# Altium PCB DC_AC_Inverter.PcbDoc (part 3 of 4)
Units mil, origin at the board's own origin, x right, y up, seen from the top; angles counter-clockwise.
Board outline 6496.06 x 4566.93 mil, 6 copper layers (L1, L2, L3, L4, L5, L6), stack 22.312 mil thick; 133 components, 65 nets, 349 pads, 134 vias.
Unrouted connection lines stored in the file: 226.
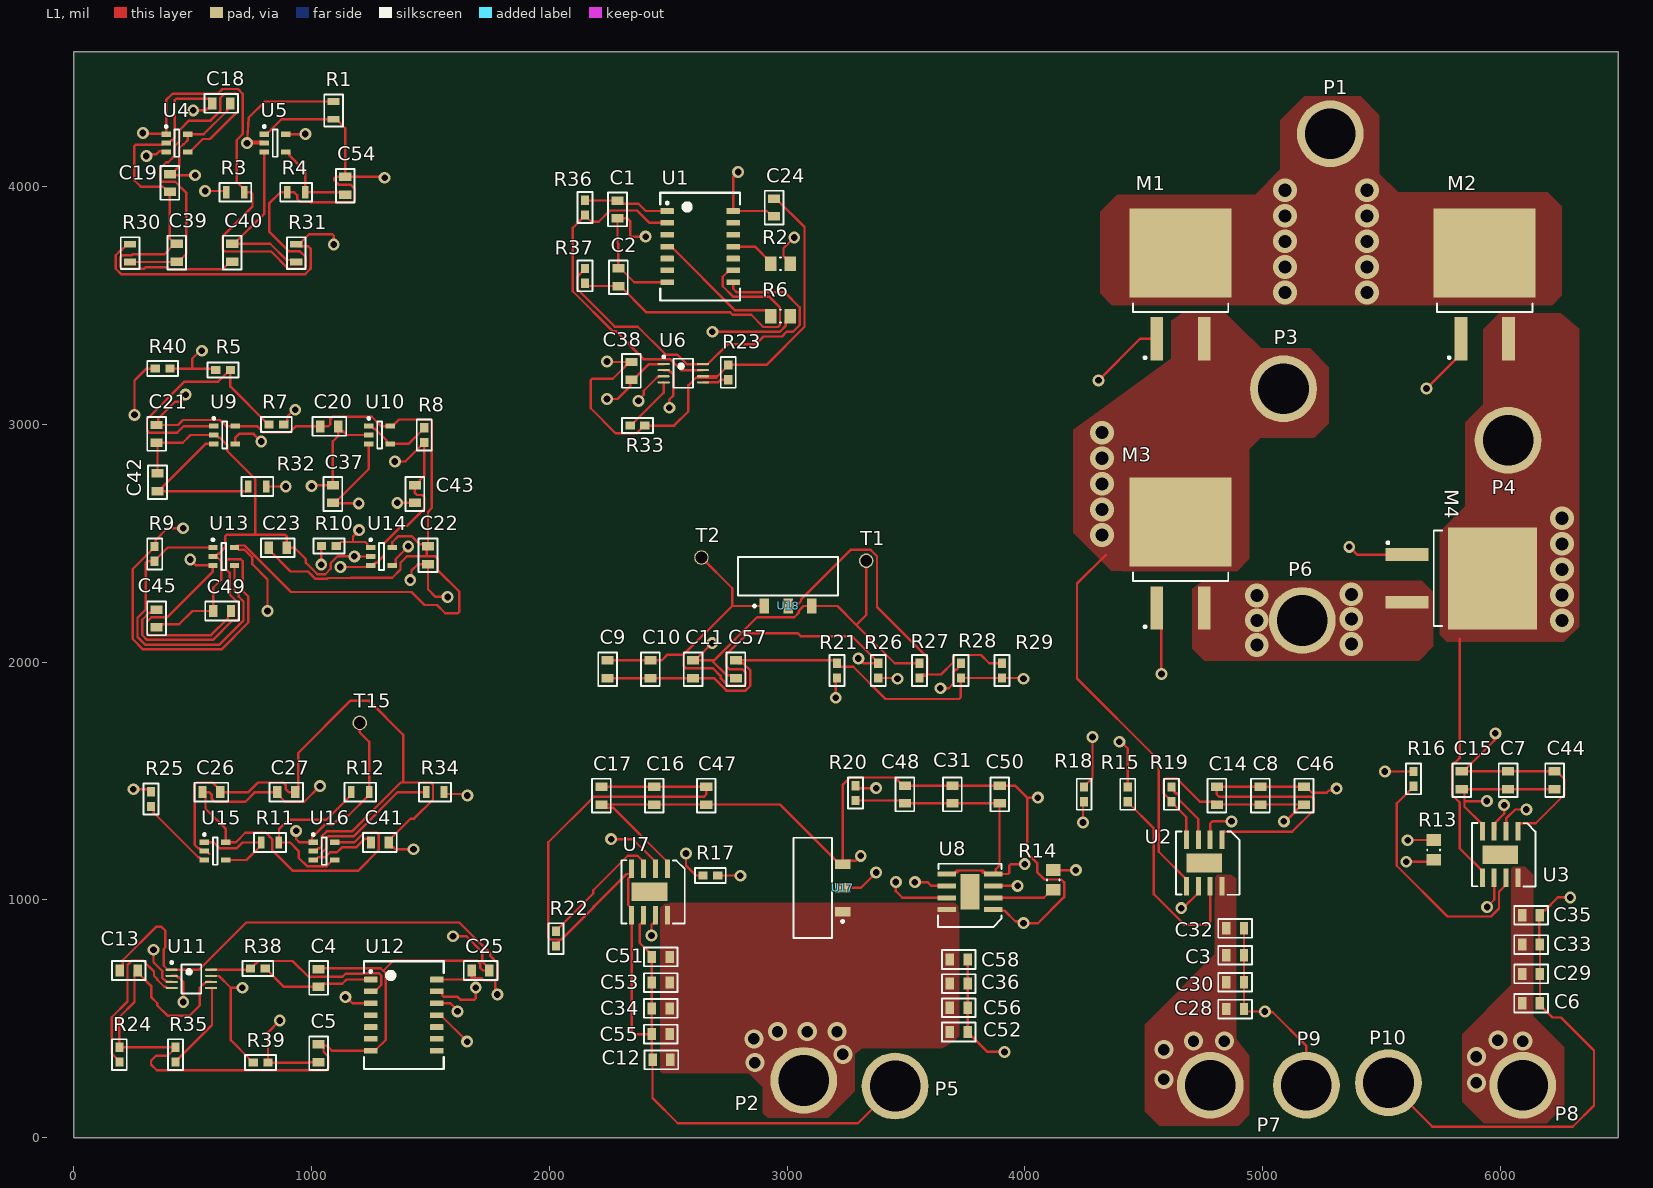
[diagram p0: L1 view]

## Part data (continued)
R28: library part ERA-2ARB751X, "Res Thin Film 0402 750 Ohm 0.1% 0.063W(1/16W) ±10ppm/C Pad SMD Automotive T/R", Case Code (Imperial)=0402, Case Code (Metric)=1005, Manufacturer=Panasonic, Manufacturer Lifecycle Status=ACTIVE, Max Operating Temperature=155°C, Max Power Dissipation=63mW, Min Operating Temperature=-55°C, Supplier Part Number=10-ERA-2ARB751XDKR-ND, Temperature Coefficient=10ppm/°C, Tolerance=0.1%, Voltage Rating=50V, Case/Package=0402, Category="Chip SMD Resistors", ComponentLink1Description=https://datasheet.octopart.com:443/ERA-2ARB751X-Panasonic-datasheet-62287448.pdf?src-supplier=Panasonic, ComponentLink1URL=https://datasheet.octopart.com:443/ERA-2ARB751X-Panasonic-datasheet-62287448.pdf?src-supplier=Panasonic, ComponentLink2Description=https://datasheet.octopart.com:443/ERA-2ARB751X-Panasonic-datasheet-46744048.pdf?src-supplier=Newark, ComponentLink2URL=https://datasheet.octopart.com:443/ERA-2ARB751X-Panasonic-datasheet-46744048.pdf?src-supplier=Newark, ComponentLink3Description=https://datasheet.octopart.com:443/ERA2ARB751X-Panasonic-datasheet-136531316.pdf?src-supplier=element14+APAC, ComponentLink3URL=https://datasheet.octopart.com:443/ERA2ARB751X-Panasonic-datasheet-136531316.pdf?src-supplier=element14+APAC, ComponentLink4Description=https://sigma.octopart.com:443/150570796/technical_drawing/Panasonic-ERA2ARB751X.pdf?src-supplier=Panasonic+SCT, ComponentLink4URL=https://sigma.octopart.com:443/150570796/technical_drawing/Panasonic-ERA2ARB751X.pdf?src-supplier=Panasonic+SCT, ComponentLink5Description=https://datasheet.octopart.com/ERA-2ARB751X-Panasonic-datasheet-78375410.pdf, ComponentLink5URL=https://datasheet.octopart.com/ERA-2ARB751X-Panasonic-datasheet-78375410.pdf, Composition="Thin Film", Features="Automotive AEC-Q200", Height=350µm, Lead Free="Lead Free", Length=990.6µm, Lifecycle Status=Production, Manufacturer Part Number=ERA-2ARB751X, Mounting Technology="Surface Mount", Number of Terminals=2, Number of Terminations=2, Packaging="Cut Tape", Part Series="Thin Film Chip Resistors, High Reliability Type", Power Dissipation=63mW, Power Rating=63mW, Pricing="1=0.46, 10=0.386, 25=0.358, 50=0.3382, 100=0.3198, 250=0.29784, 500=0.28296, 1000=0.26954, 5000=0.25765 (USD)", REACH SVHC=Yes, RoHS=Compliant, Stock=11665, Supplier=DigiKey, Voltage Rating (DC)=50V, Width=500µm, Working Voltage=50V
R40: library part RC0402FR-07470KL, "62.5mW Thick Film Resistors 50V ±100ppm/℃ ±1% 470kΩ 0402 Chip Resistor - Surface Mount ROHS", Case Code (Imperial)=0402, Manufacturer="Yageo Group", Max Operating Temperature=155°C, Max Power Dissipation=63mW, Min Operating Temperature=-55°C, Power Dissipation=62.5mW, Supplier Part Number=311-470KLRCT-ND, Temperature Coefficient=100ppm/°C, Tolerance=1%, Voltage Rating=50V, Case/Package=0402, Category="Chip SMD Resistors", China RoHS=Non-Compliant, ComponentLink1Description=https://datasheet.octopart.com:443/RC0402FR-07470KL-Yageo-datasheet-175887523.pdf?src-supplier=IHS, ComponentLink1URL=https://datasheet.octopart.com:443/RC0402FR-07470KL-Yageo-datasheet-175887523.pdf?src-supplier=IHS, ComponentLink2Description=https://datasheet.octopart.com:443/RC0402FR-07470KL-Yageo-datasheet-103092701.pdf?src-supplier=Upverter, ComponentLink2URL=https://datasheet.octopart.com:443/RC0402FR-07470KL-Yageo-datasheet-103092701.pdf?src-supplier=Upverter, ComponentLink3Description=https://datasheet.octopart.com:443/RC0402FR-07470KL-Yageo-datasheet-141435361.pdf?src-supplier=Upverter, ComponentLink3URL=https://datasheet.octopart.com:443/RC0402FR-07470KL-Yageo-datasheet-141435361.pdf?src-supplier=Upverter, ComponentLink4Description=https://datasheet.octopart.com:443/RC0402FR-07470KL-Yageo-Group-datasheet-190305687.pdf?src-supplier=Newark, ComponentLink4URL=https://datasheet.octopart.com:443/RC0402FR-07470KL-Yageo-Group-datasheet-190305687.pdf?src-supplier=Newark, ComponentLink5Description=https://datasheet.octopart.com:443/RC0402FR-07470KL-Yageo-datasheet-8324527.pdf?src-supplier=Newark, ComponentLink5URL=https://datasheet.octopart.com:443/RC0402FR-07470KL-Yageo-datasheet-8324527.pdf?src-supplier=Newark, ComponentLink6Description=https://datasheet.octopart.com:443/RC0402FR-07470KL-Yageo-datasheet-10408619.pdf?src-supplier=element14+APAC, ComponentLink6URL=https://datasheet.octopart.com:443/RC0402FR-07470KL-Yageo-datasheet-10408619.pdf?src-supplier=element14+APAC, ComponentLink7Description=https://datasheet.octopart.com:443/RC0402FR-07470KL-Yageo-datasheet-62067350.pdf?src-supplier=element14+APAC, ComponentLink7URL=https://datasheet.octopart.com:443/RC0402FR-07470KL-Yageo-datasheet-62067350.pdf?src-supplier=element14+APAC, ComponentLink8Description=https://datasheet.octopart.com:443/RC0402FR-07470KL-Yageo-Group-datasheet-176638170.pdf?src-supplier=Future+Electronics, ComponentLink8URL=https://datasheet.octopart.com:443/RC0402FR-07470KL-Yageo-Group-datasheet-176638170.pdf?src-supplier=Future+Electronics, ComponentLink9Description=https://datasheet.octopart.com:443/RC0402FR-07470KL-Yageo-datasheet-164759695.pdf?src-supplier=Future+Electronics, ComponentLink9URL=https://datasheet.octopart.com:443/RC0402FR-07470KL-Yageo-datasheet-164759695.pdf?src-supplier=Future+Electronics, ComponentLink10Description=https://datasheet.octopart.com:443/RC0402FR-07470KL-Yageo-datasheet-137700087.pdf?src-supplier=Future+Electronics, ComponentLink10URL=https://datasheet.octopart.com:443/RC0402FR-07470KL-Yageo-datasheet-137700087.pdf?src-supplier=Future+Electronics, ComponentLink11Description=https://datasheet.octopart.com:443/RC0402FR-07470KL-Yageo-datasheet-12531192.pdf?src-supplier=Future+Electronics, ComponentLink11URL=https://datasheet.octopart.com:443/RC0402FR-07470KL-Yageo-datasheet-12531192.pdf?src-supplier=Future+Electronics, ComponentLink12Description=https://datasheet.octopart.com:443/RC0402FR-07470KL-Yageo-datasheet-505231.pdf?src-supplier=Future+Electronics, ComponentLink12URL=https://datasheet.octopart.com:443/RC0402FR-07470KL-Yageo-datasheet-505231.pdf?src-supplier=Future+Electronics, ComponentLink13Description=https://datasheet.octopart.com:443/RC0402FR-07470KL-Yageo-datasheet-148775077.pdf?src-supplier=TME, ComponentLink13URL=https://datasheet.octopart.com:443/RC0402FR-07470KL-Yageo-datasheet-148775077.pdf?src-supplier=TME, ComponentLink14Description=https://datasheet.octopart.com/RC0402FR-07470KL-Yageo-datasheet-73766026.pdf, ComponentLink14URL=https://datasheet.octopart.com/RC0402FR-07470KL-Yageo-datasheet-73766026.pdf, ComponentLink15Description=https://datasheet.octopart.com:443/RC0402FR-07470KL-Yageo-datasheet-8329306.pdf?src-supplier=element14, ComponentLink15URL=https://datasheet.octopart.com:443/RC0402FR-07470KL-Yageo-datasheet-8329306.pdf?src-supplier=element14, ComponentLink16Description=http://sigma.octopart.com:80/conflict_mineral_statement/Yageo-company-3.pdf?src-supplier=Compliance+Statements, ComponentLink16URL=http://sigma.octopart.com:80/conflict_mineral_statement/Yageo-company-3.pdf?src-supplier=Compliance+Statements, ComponentLink17Description=http://sigma.octopart.com:80/rohs_statement/Yageo-company-2.pdf?src-supplier=Compliance+Statements, ComponentLink17URL=http://sigma.octopart.com:80/rohs_statement/Yageo-company-2.pdf?src-supplier=Compliance+Statements, Composition="Thick Film", Depth=500µm, Features="Moisture Resistant", Height=350µm, Lead Free="Lead Free", Length=1mm, Lifecycle Status=Production, Manufacturer Part Number=RC0402FR-07470KL, Military Standard=Not, Mounting Technology="Surface Mount", Number of Terminals=2, Number of Terminations=2, Packaging="Tape & Reel", Pins=2, Power Rating=63mW, Pricing="1=0.1, 10=0.007, 25=0.0056, 50=0.004, 100=0.0033 (USD)", REACH SVHC=Yes, RoHS=Compliant, Schedule B="8533210045, 8533210045|8533210045, 8533210045|8533210045|8533210045, 8533210045|8533210045|8533210045|8533210045", Stock=557194, Supplier=DigiKey, Termination=SMD/SMT, Voltage Rating (AC)=50V, Voltage Rating (DC)=50V, Width=500µm, Working Voltage=50V
T1 T2 T15: "Holes to test various points in the shcematic"
U1 U12: library part CD4081BNSR, "AND CD4081 EAR99 4000B logic gate circuit 90ns @ 15V 50pF 2mm 3.4mA 3.4mA 3.5V-11V", Case/Package=SOP, High Level Output Current=-4.2mA, Low Level Output Current=4.2mA, Manufacturer="Texas Instruments", Manufacturer Lifecycle Status=ACTIVE, Max Operating Temperature=125°C, Max Supply Voltage=18V, Min Operating Temperature=-55°C, Min Supply Voltage=3V, Output Current=6.8mA, Quiescent Current=5µA, Supplier Part Number=296-14140-1-ND, Category="Logic Gates", ComponentLink1Description=https://datasheet.octopart.com:443/CD4081BNSR-Texas-Instruments-datasheet-10794629.pdf?src-supplier=Texas+Instruments, ComponentLink1URL=https://datasheet.octopart.com:443/CD4081BNSR-Texas-Instruments-datasheet-10794629.pdf?src-supplier=Texas+Instruments, ComponentLink2Description=https://octopart.com:443/opatz8j6/c1?t=YxbNdJKEROS6Vm5KtYNJ_JyZt7EceMX1SIRKQtAb4Y8lWUVkYy39ZyZsE2-WATvXZN4TSf20npuENvJODiCamDGCNWilka1l9iY4MkQYjKrpUEBaOEb4I2_cjKmMvO0DzDUmCdmSlAdJj-YSBZskjReuIVWeu6zcmJhI4EWYC-jOIWhKVjLUC_2s64ZlV_TJwr1GUdjj7NQs9rSYcxVAXH8GRRzJ5L1klAQGmdoT7dVvhwtaa6KXKHm16KdF4QYR2F57j4FMw7rbM3S3FyRlCmusYW7cmmmcGzT9BesW2olY17NxMao1sKhRxMKa-IHifCTXBKwmACtW2WB27Rp4O6n1txafArR9v5gRBTXi256STLSQN5zqflUpFaagCkJJpZWf&src-supplier=Texas+Instruments, ComponentLink2URL=https://octopart.com:443/opatz8j6/c1?t=YxbNdJKEROS6Vm5KtYNJ_JyZt7EceMX1SIRKQtAb4Y8lWUVkYy39ZyZsE2-WATvXZN4TSf20npuENvJODiCamDGCNWilka1l9iY4MkQYjKrpUEBaOEb4I2_cjKmMvO0DzDUmCdmSlAdJj-YSBZskjReuIVWeu6zcmJhI4EWYC-jOIWhKVjLUC_2s64ZlV_TJwr1GUdjj7NQs9rSYcxVAXH8GRRzJ5L1klAQGmdoT7dVvhwtaa6KXKHm16KdF4QYR2F57j4FMw7rbM3S3FyRlCmusYW7cmmmcGzT9BesW2olY17NxMao1sKhRxMKa-IHifCTXBKwmACtW2WB27Rp4O6n1txafArR9v5gRBTXi256STLSQN5zqflUpFaagCkJJpZWf&src-supplier=Texas+Instruments, ComponentLink3Description=https://datasheet.octopart.com:443/CD4081BNSR-Texas-Instruments-datasheet-10253444.pdf?src-supplier=Texas+Instruments, ComponentLink3URL=https://datasheet.octopart.com:443/CD4081BNSR-Texas-Instruments-datasheet-10253444.pdf?src-supplier=Texas+Instruments, ComponentLink4Description=https://sigma.octopart.com:443/49249817/technical_drawing/Texas-Instruments-CD4081BNSR.pdf?src-supplier=Texas+Instruments, ComponentLink4URL=https://sigma.octopart.com:443/49249817/technical_drawing/Texas-Instruments-CD4081BNSR.pdf?src-supplier=Texas+Instruments, ComponentLink5Description=https://datasheet.octopart.com:443/CD4081BNSR-Texas-Instruments-datasheet-151253.pdf?src-supplier=Texas+Instruments, ComponentLink5URL=https://datasheet.octopart.com:443/CD4081BNSR-Texas-Instruments-datasheet-151253.pdf?src-supplier=Texas+Instruments, ComponentLink6Description=https://datasheet.octopart.com:443/CD4081BNSR-Texas-Instruments-datasheet-10253518.pdf?src-supplier=Texas+Instruments, ComponentLink6URL=https://datasheet.octopart.com:443/CD4081BNSR-Texas-Instruments-datasheet-10253518.pdf?src-supplier=Texas+Instruments, ComponentLink7Description=https://datasheet.octopart.com:443/CD4081BNSR-Texas-Instruments-datasheet-164413312.pdf?src-supplier=SHENGYU+ELECTRONICS, ComponentLink7URL=https://datasheet.octopart.com:443/CD4081BNSR-Texas-Instruments-datasheet-164413312.pdf?src-supplier=SHENGYU+ELECTRONICS, ComponentLink8Description=https://datasheet.octopart.com:443/CD4081BNSR-Texas-Instruments-datasheet-47642733.pdf?src-supplier=Newark, ComponentLink8URL=https://datasheet.octopart.com:443/CD4081BNSR-Texas-Instruments-datasheet-47642733.pdf?src-supplier=Newark, ComponentLink9Description=https://datasheet.octopart.com:443/CD4081BNSR-Texas-Instruments-datasheet-27379352.pdf?src-supplier=Newark, ComponentLink9URL=https://datasheet.octopart.com:443/CD4081BNSR-Texas-Instruments-datasheet-27379352.pdf?src-supplier=Newark, ComponentLink10Description=https://datasheet.octopart.com:443/CD4081BNSR-Texas-Instruments-datasheet-11534476.pdf?src-supplier=Newark, ComponentLink10URL=https://datasheet.octopart.com:443/CD4081BNSR-Texas-Instruments-datasheet-11534476.pdf?src-supplier=Newark, ComponentLink11Description=https://datasheet.octopart.com:443/CD4081BNSR-Texas-Instruments-datasheet-14147925.pdf?src-supplier=iiiC, ComponentLink11URL=https://datasheet.octopart.com:443/CD4081BNSR-Texas-Instruments-datasheet-14147925.pdf?src-supplier=iiiC, ComponentLink12Description=https://datasheet.octopart.com:443/CD4081BNSR-Texas-Instruments-datasheet-10549843.pdf?src-supplier=Factory+Futures, ComponentLink12URL=https://datasheet.octopart.com:443/CD4081BNSR-Texas-Instruments-datasheet-10549843.pdf?src-supplier=Factory+Futures, ComponentLink13Description=https://datasheet.octopart.com:443/CD4081BNSR-Texas-Instruments-datasheet-32637.pdf?src-supplier=DigiKey, ComponentLink13URL=https://datasheet.octopart.com:443/CD4081BNSR-Texas-Instruments-datasheet-32637.pdf?src-supplier=DigiKey, ComponentLink14Description=http://sigma.octopart.com:80/reach_statement/Texas-Instruments-company-64.pdf?src-supplier=Compliance+Statements, ComponentLink14URL=http://sigma.octopart.com:80/reach_statement/Texas-Instruments-company-64.pdf?src-supplier=Compliance+Statements, ComponentLink15Description=http://sigma.octopart.com:80/conflict_mineral_statement/Texas-Instruments-company-63.pdf?src-supplier=Compliance+Statements, ComponentLink15URL=http://sigma.octopart.com:80/conflict_mineral_statement/Texas-Instruments-company-63.pdf?src-supplier=Compliance+Statements, Contact Plating=Gold, Height=2mm, Lead Free="Lead Free", Length=10.3mm, Lifecycle Status=Production, Logic Function=AND, Manufacturer Part Number=CD4081BNSR, Mounting Technology="Surface Mount", Number of Bits=4, Number of Circuits=4, Number of Elements=4, Number of Gates=4, Number of Input Lines=2, Number of Inputs=2, Number of Output Lines=1, Number of Outputs=1, Packaging="Tape & Reel (TR)", Pins=14, Pricing="1=1.05, 10=0.759, 25=0.6852, 100=0.6044, 250=0.56576, 500=0.54468 (USD)", Propagation Delay=90ns, Radiation Hardening=No, REACH SVHC=Unknown, RoHS=Compliant, Schedule B="8542390000, 8542390000|8542390000|8542390000|8542390000|8542390000", Stock=18442, Supplier=DigiKey, Thickness=1.95mm, Turn-On Delay Time=12ns, Weight=208.312296mg, Width=5.3mm
U2 U3 U7 U8: "MOSFET and Power Driver 5.7A Single Hi/Lo Side Inv/Non-Inv 8-Pin SOIC N", Manufacturer="Analog Devices", Manufacturer Lifecycle Status=PRODUCTION, Supplier Part Number=505-MAX22700EASA+-ND, Category="Gate Drivers", ComponentLink1Description=https://octopart.com:443/opatz8j6/c1?t=d9IZSUmFVmeiFEza4JYbjCWptqKSo-oQrcC1b9HLTjM8SgyuA4rt-UKLM_lg9g92uG_YGkggQNQDDUh9x4eYhYYEMlQ8EOGcy0xOKi9661-_2CNFuO_xUPCr0tlrUuDNx5JxL_q4fqwVbfWNc6gzFK95mza5n0-2OqiRTSdQMqBJJ3jfFhDTTNhArzy4ja8X3-lVsfTDz1_T9Hz63hwEk8N8vFkwyr2QE6k72H11354Duarn8LyBg1osG7gxDlOgtPiAaIzdtHupEHI9cRpmJmLPIvktPYVFuVJHI9DYJJb4FuPS1DQFZqpfVzQ&src-supplier=Analog+Devices, ComponentLink1URL=https://octopart.com:443/opatz8j6/c1?t=d9IZSUmFVmeiFEza4JYbjCWptqKSo-oQrcC1b9HLTjM8SgyuA4rt-UKLM_lg9g92uG_YGkggQNQDDUh9x4eYhYYEMlQ8EOGcy0xOKi9661-_2CNFuO_xUPCr0tlrUuDNx5JxL_q4fqwVbfWNc6gzFK95mza5n0-2OqiRTSdQMqBJJ3jfFhDTTNhArzy4ja8X3-lVsfTDz1_T9Hz63hwEk8N8vFkwyr2QE6k72H11354Duarn8LyBg1osG7gxDlOgtPiAaIzdtHupEHI9cRpmJmLPIvktPYVFuVJHI9DYJJb4FuPS1DQFZqpfVzQ&src-supplier=Analog+Devices, ComponentLink2Description=https://datasheet.octopart.com:443/MAX22700EASA%2B-Analog-Devices-datasheet-145303846.pdf?src-supplier=Ciiva, ComponentLink2URL=https://datasheet.octopart.com:443/MAX22700EASA%2B-Analog-Devices-datasheet-145303846.pdf?src-supplier=Ciiva, ComponentLink3Description=http://sigma.octopart.com:80/conflict_mineral_statement/Analog-Devices-company-33.pdf?src-supplier=Compliance+Statements, ComponentLink3URL=http://sigma.octopart.com:80/conflict_mineral_statement/Analog-Devices-company-33.pdf?src-supplier=Compliance+Statements, ComponentLink4Description=http://sigma.octopart.com:80/conflict_mineral_statement/Maxim-Integrated-company-65.pdf?src-supplier=Compliance+Statements, ComponentLink4URL=http://sigma.octopart.com:80/conflict_mineral_statement/Maxim-Integrated-company-65.pdf?src-supplier=Compliance+Statements, ComponentLink5Description=http://sigma.octopart.com:80/rohs_statement/Maxim-Integrated-company-66.pdf?src-supplier=Compliance+Statements, ComponentLink5URL=http://sigma.octopart.com:80/rohs_statement/Maxim-Integrated-company-66.pdf?src-supplier=Compliance+Statements, ComponentLink6Description=http://sigma.octopart.com:80/reach_statement/Maxim-Integrated-company-67.pdf?src-supplier=Compliance+Statements, ComponentLink6URL=http://sigma.octopart.com:80/reach_statement/Maxim-Integrated-company-67.pdf?src-supplier=Compliance+Statements, ComponentLink7Description=https://octopart.com:443/opatz8j6/c1?t=uq9ks65Rkl-f3xSZdxgFjQRktIJqr0XuISwlccZ9Be3A96kxw8KZXdJ2R1X8XijkZLzXX_Xf2iZ_1EYJiUW-k3O4zzF9VXGePyBlVwW68QXhCbuH73gJl5377Ogb3TIEqv1OFx2-kQa3MNaShuM43P0kqkThB15XIv8QEBeG0XiKApOZKBhFvtXuZuIU7_A7qb6Iwuw6Bk-DseikFnDV46qMQ0MwWtmQC_KZQpuB1lSHH6Kpq4IZwI1eexe3v5AcbCWclbrw0yEalPIZQxO6oIfrtCgyasXv1NOmGCZnwU25xZx-CHft1dwr-KU&src-supplier=Compliance+Statements, ComponentLink7URL=https://octopart.com:443/opatz8j6/c1?t=uq9ks65Rkl-f3xSZdxgFjQRktIJqr0XuISwlccZ9Be3A96kxw8KZXdJ2R1X8XijkZLzXX_Xf2iZ_1EYJiUW-k3O4zzF9VXGePyBlVwW68QXhCbuH73gJl5377Ogb3TIEqv1OFx2-kQa3MNaShuM43P0kqkThB15XIv8QEBeG0XiKApOZKBhFvtXuZuIU7_A7qb6Iwuw6Bk-DseikFnDV46qMQ0MwWtmQC_KZQpuB1lSHH6Kpq4IZwI1eexe3v5AcbCWclbrw0yEalPIZQxO6oIfrtCgyasXv1NOmGCZnwU25xZx-CHft1dwr-KU&src-supplier=Compliance+Statements, Lifecycle Status=Production, Manufacturer Part Number=MAX22700EASA+, Pricing="1=4.56, 10=3.467, 25=3.1924, 100=2.8907, 300=2.72233, 500=2.66008, 1000=2.58869, 2500=2.51336 (USD)", RoHS=Compliant, Stock=18, Supplier=DigiKey
U4 U5 U9 U10 U13 U14 U15 U16: library part LTC6240HVCS5#TRPBF, "Single 18MHz, Low Noise, Rail-to-Rail Output, CMOS Op Amp", Case/Package=SOT-23-5, Input Bias Current=500fA, Input Offset Voltage (Vos)=40µV, Manufacturer="Analog Devices", Manufacturer Lifecycle Status=PRODUCTION, Max Dual Supply Voltage=5.5V, Max Operating Temperature=70°C, Max Supply Voltage=12V, Min Dual Supply Voltage=1.4V, Min Operating Temperature=0°C, Min Supply Voltage=2.8V, Operating Supply Current=2.7mA, Output Current per Channel=35mA, Power Supply Rejection Ratio (PSRR)=80dB, Supplier Part Number=LTC6240HVCS5#TRPBFCT-ND, Voltage Gain=124.08dB, Category="Amplifiers - Op Amps, Buffer, Instrumentation", Common Mode Rejection Ratio=80dB, ComponentLink1Description=https://octopart.com:443/opatz8j6/c1?t=EoJOC4xHGWqq0IzwURpvuTilUJr6oxn8FCFETNO4Zq2hCVGiVcszmCedJy3IM0JOiUrIiZW9OAkJEQuEVAP-9E-dA8NA1y2i1SkXDiRrK1hKzR0l3o3qbUhDn6e2gsbGFkXSeOh1NRwjTJqd3iDw0CugYr4FYbUt-t-yfMuHmZvzr6pA2z0fXrsVIGq1zoMZRKJzy6TiYnY4VDdrN1O0MY2z6NltC_O6gViF_xTQrYt4hMzkVZYWRWTFVHrCY31KCHJLiGAuWLJr-XK7_W8ecdUcfdWHr6PujJR28pJyTDxpp5OPCnCSHhk&src-supplier=Analog+Devices, ComponentLink1URL=https://octopart.com:443/opatz8j6/c1?t=EoJOC4xHGWqq0IzwURpvuTilUJr6oxn8FCFETNO4Zq2hCVGiVcszmCedJy3IM0JOiUrIiZW9OAkJEQuEVAP-9E-dA8NA1y2i1SkXDiRrK1hKzR0l3o3qbUhDn6e2gsbGFkXSeOh1NRwjTJqd3iDw0CugYr4FYbUt-t-yfMuHmZvzr6pA2z0fXrsVIGq1zoMZRKJzy6TiYnY4VDdrN1O0MY2z6NltC_O6gViF_xTQrYt4hMzkVZYWRWTFVHrCY31KCHJLiGAuWLJr-XK7_W8ecdUcfdWHr6PujJR28pJyTDxpp5OPCnCSHhk&src-supplier=Analog+Devices, ComponentLink2Description=https://datasheet.octopart.com:443/LTC6240HVCS5%23TRPBF-Analog-Devices-datasheet-10696582.pdf?src-supplier=Upverter, ComponentLink2URL=https://datasheet.octopart.com:443/LTC6240HVCS5%23TRPBF-Analog-Devices-datasheet-10696582.pdf?src-supplier=Upverter, ComponentLink3Description=https://sigma.octopart.com:443/57691980/technical_drawing/Linear-Technology-LTC6240HVCS5%23TRPBF.pdf?src-supplier=Linear+Technology, ComponentLink3URL=https://sigma.octopart.com:443/57691980/technical_drawing/Linear-Technology-LTC6240HVCS5%23TRPBF.pdf?src-supplier=Linear+Technology, ComponentLink4Description=https://datasheet.octopart.com:443/LTC6240HVCS5%23TRPBF-Linear-Technology-datasheet-503439.pdf?src-supplier=Component+Distributors+Inc., ComponentLink4URL=https://datasheet.octopart.com:443/LTC6240HVCS5%23TRPBF-Linear-Technology-datasheet-503439.pdf?src-supplier=Component+Distributors+Inc., ComponentLink5Description=http://sigma.octopart.com:80/conflict_mineral_statement/Analog-Devices-company-33.pdf?src-supplier=Compliance+Statements, ComponentLink5URL=http://sigma.octopart.com:80/conflict_mineral_statement/Analog-Devices-company-33.pdf?src-supplier=Compliance+Statements, ComponentLink6Description=https://octopart.com:443/opatz8j6/c1?t=WciAb8yNP9zuV9g87N3rk5A8aCwiNghx0T8LnhJFV6mKRZRGd55L4dKBPqx6qz3aqpltFHBg-8-BEwTcxfVEDGCQmnON-Gh2PRs8fnVgja709s1gnSHSPuZXis5aMSZAZOU881N3PgSj_buHp1gdatZw-Uix3fDtvuX3209Gm_KbWJ2H22rQDQ9m-2pL5NIQ_aaWB8j4M3xvDUEKrJd1jVzLSn7BPdLnFgEQCROBfoqhRN-2s8LQTzaPSFCP_0_4CdaH0GP8ZwV9vcO0T0oUPTEZ_K4gady1_XxW9ouI33HB3rRb-AWCaPQ&src-supplier=Compliance+Statements, ComponentLink6URL=https://octopart.com:443/opatz8j6/c1?t=WciAb8yNP9zuV9g87N3rk5A8aCwiNghx0T8LnhJFV6mKRZRGd55L4dKBPqx6qz3aqpltFHBg-8-BEwTcxfVEDGCQmnON-Gh2PRs8fnVgja709s1gnSHSPuZXis5aMSZAZOU881N3PgSj_buHp1gdatZw-Uix3fDtvuX3209Gm_KbWJ2H22rQDQ9m-2pL5NIQ_aaWB8j4M3xvDUEKrJd1jVzLSn7BPdLnFgEQCROBfoqhRN-2s8LQTzaPSFCP_0_4CdaH0GP8ZwV9vcO0T0oUPTEZ_K4gady1_XxW9ouI33HB3rRb-AWCaPQ&src-supplier=Compliance+Statements, Gain Bandwidth Product=18MHz, Lifecycle Status=Production, Manufacturer Part Number=LTC6240HVCS5#TRPBF, Nominal Gain Bandwidth Product=18MHz, Number of Channels=1, Number of Circuits=1, Number of Elements=1, Pins=5, Pricing="1=5.62, 10=3.682, 25=3.178, 100=2.6081, 250=2.32816, 500=2.15598, 1000=2.0875 (USD)", RoHS=Compliant, Schedule B=8542330000, Slew Rate=10V/µs, Stock=608, Supplier=DigiKey
U6 U11: library part LT1711CMS8#TRPBF, "Comparator, 1 Func, 6000uV Offset-Max, 5.5ns Response Time, PDSO8", Case/Package=MSOP, Dual Supply Voltage=3V, Input Bias Current=5µA, Input Offset Voltage (Vos)=5mV, Manufacturer="Analog Devices", Manufacturer Lifecycle Status=PRODUCTION, Max Dual Supply Voltage=3.5V, Max Operating Temperature=85°C, Max Supply Voltage=12V, Min Dual Supply Voltage=1.2V, Min Operating Temperature=-40°C, Min Supply Voltage=2.4V, Output Current=20mA, Power Supply Rejection Ratio (PSRR)=85dB, Quiescent Current=22mA, Supplier Part Number=LT1711CMS8#TRPBFCT-ND, Voltage Gain=83.52dB, Category=Comparators, Common Mode Rejection Ratio=85dB, ComponentLink1Description=https://datasheet.octopart.com:443/LT1711CMS8%23TRPBF-Analog-Devices-datasheet-10875408.pdf?src-supplier=Upverter, ComponentLink1URL=https://datasheet.octopart.com:443/LT1711CMS8%23TRPBF-Analog-Devices-datasheet-10875408.pdf?src-supplier=Upverter, ComponentLink2Description=https://octopart.com:443/opatz8j6/c1?t=650wlvKgRWePQJ-YQfhsSkbrZKYDfddFKR30Pp4clKTLmQX5EVcfxF7zy-kc5koLkDxHTRYRN_B3Ny87B9bmV_c9SyVMUnfKuNcS4mmeLxWPRV8jKqIUNmt9U3DobyKC0m2MBwfFbz01P5Hy_wy0NXjMJyXdAbGyqFhD_jhyaJfJ26v792jlQm0ErKRp1UjjVY9BZslcaskmKsL6xJsX4oNUx0LtaC6UIuSKqy15rF3GND51pM_3zZ9lo8oMlZmILwm2IzCFUc_NrKjwIWQ5WZVa4euGqcnDRfh7_s6LA3x7C_zoIgl14A&src-supplier=Analog+Devices, ComponentLink2URL=https://octopart.com:443/opatz8j6/c1?t=650wlvKgRWePQJ-YQfhsSkbrZKYDfddFKR30Pp4clKTLmQX5EVcfxF7zy-kc5koLkDxHTRYRN_B3Ny87B9bmV_c9SyVMUnfKuNcS4mmeLxWPRV8jKqIUNmt9U3DobyKC0m2MBwfFbz01P5Hy_wy0NXjMJyXdAbGyqFhD_jhyaJfJ26v792jlQm0ErKRp1UjjVY9BZslcaskmKsL6xJsX4oNUx0LtaC6UIuSKqy15rF3GND51pM_3zZ9lo8oMlZmILwm2IzCFUc_NrKjwIWQ5WZVa4euGqcnDRfh7_s6LA3x7C_zoIgl14A&src-supplier=Analog+Devices, ComponentLink3Description=https://sigma.octopart.com:443/57689691/technical_drawing/Linear-Technology-LT1711CMS8%23TRPBF.pdf?src-supplier=Linear+Technology, ComponentLink3URL=https://sigma.octopart.com:443/57689691/technical_drawing/Linear-Technology-LT1711CMS8%23TRPBF.pdf?src-supplier=Linear+Technology, ComponentLink4Description=https://datasheet.octopart.com:443/LT1711CMS8%23TRPBF-Linear-Technology-datasheet-531423.pdf?src-supplier=Arrow+Electronics, ComponentLink4URL=https://datasheet.octopart.com:443/LT1711CMS8%23TRPBF-Linear-Technology-datasheet-531423.pdf?src-supplier=Arrow+Electronics, ComponentLink5Description=https://datasheet.octopart.com:443/LT1711CMS8%23TRPBF-Linear-Technology-datasheet-8633398.pdf?src-supplier=Component+Distributors+Inc., ComponentLink5URL=https://datasheet.octopart.com:443/LT1711CMS8%23TRPBF-Linear-Technology-datasheet-8633398.pdf?src-supplier=Component+Distributors+Inc., ComponentLink6Description=http://sigma.octopart.com:80/conflict_mineral_statement/Analog-Devices-company-33.pdf?src-supplier=Compliance+Statements, ComponentLink6URL=http://sigma.octopart.com:80/conflict_mineral_statement/Analog-Devices-company-33.pdf?src-supplier=Compliance+Statements, ComponentLink7Description=https://octopart.com:443/opatz8j6/c1?t=dAkp5kuc4KinSuP60yLax01msfIdztXowOgvkuxzK3Ra-UG4s06W2o_Xknc9JFX10aGYdTDUDBu2YNVFrkx2WBDwiC1YG88wO0ahyiKjj84zGTHOqe6cdtECQCEg93bmhFrsTCKVU7XbI3Zx06BEHOSu75LsOIq3TdBLQ5RT2DUKzT7jTBeQnoZARtK9_sxDhnuz0peBXUPQFjmRShESnohF-C6lickybiUrna3amnDJggXX-SPCJw8XiYYPkAdcaGi6qpHt1rmN3o5XFTfLIZB1rU2ryKzDVzzLOCbWDs5ZWSHRXIcx7Q&src-supplier=Compliance+Statements, ComponentLink7URL=https://octopart.com:443/opatz8j6/c1?t=dAkp5kuc4KinSuP60yLax01msfIdztXowOgvkuxzK3Ra-UG4s06W2o_Xknc9JFX10aGYdTDUDBu2YNVFrkx2WBDwiC1YG88wO0ahyiKjj84zGTHOqe6cdtECQCEg93bmhFrsTCKVU7XbI3Zx06BEHOSu75LsOIq3TdBLQ5RT2DUKzT7jTBeQnoZARtK9_sxDhnuz0peBXUPQFjmRShESnohF-C6lickybiUrna3amnDJggXX-SPCJw8XiYYPkAdcaGi6qpHt1rmN3o5XFTfLIZB1rU2ryKzDVzzLOCbWDs5ZWSHRXIcx7Q&src-supplier=Compliance+Statements, Hysteresis=100mV, Lead Free="Lead Free", Lifecycle Status=Production, Manufacturer Part Number=LT1711CMS8#TRPBF, Number of Channels=1, Number of Elements=1, Output Type=TTL, Packaging="Tape & Reel (TR)", Pins=8, Pricing="1=8.28, 10=5.556, 25=4.846, 100=4.0433, 250=3.6492, 500=3.55 (USD)", Propagation Delay=6ns, Response Time=5.5ns, RoHS=Compliant, Stock=597, Supplier=DigiKey
U17 U18: library part LT317AT#PBF, "LDO Regulator Pos 1.5A 3-Pin(3+Tab) TO-220", Case/Package=TO-220, Dropout Voltage=2.5V, Manufacturer="Analog Devices", Manufacturer Lifecycle Status=PRODUCTION, Max Operating Temperature=125°C, Max Output current=1.5A, Max Supply Voltage=40V, Min Input Voltage=3V, Min Operating Temperature=0°C, Output Voltage Accuracy=1%, Reference Voltage=1.25V, Supplier Part Number=505-LT317AT#PBF-ND, Category="Voltage Regulators - Linear", ComponentLink1Description=https://octopart.com:443/opatz8j6/c1?t=tdoiWRgwZnV-Wph107wcHS5xQQXSIdO2-gyuBhF36HPp7t9yl-Td0csXaHC6kf42ttkNy5k4FvsX6PxBomCL0zX1cJp6livUo3VcnVMqaO14i1GaDjF3JVd6-9oOOBs7C29wDgI-QKi5yyCG6FfzAKxSdPPuF69YPUS-NO0Sm5gTlSwZ2ZL3tbi_UnVguRaZJZl5o1g4mHwEAghi5QAsAvWfoFOn7YTYqrJw1tyji750Y7Uz6wtF9kQQDVuHzX_OsyqcxduaQsGHQSbiI2FVTswyENmvOewqRtRFtIHnqbKI_68J1sI-&src-supplier=Analog+Devices, ComponentLink1URL=https://octopart.com:443/opatz8j6/c1?t=tdoiWRgwZnV-Wph107wcHS5xQQXSIdO2-gyuBhF36HPp7t9yl-Td0csXaHC6kf42ttkNy5k4FvsX6PxBomCL0zX1cJp6livUo3VcnVMqaO14i1GaDjF3JVd6-9oOOBs7C29wDgI-QKi5yyCG6FfzAKxSdPPuF69YPUS-NO0Sm5gTlSwZ2ZL3tbi_UnVguRaZJZl5o1g4mHwEAghi5QAsAvWfoFOn7YTYqrJw1tyji750Y7Uz6wtF9kQQDVuHzX_OsyqcxduaQsGHQSbiI2FVTswyENmvOewqRtRFtIHnqbKI_68J1sI-&src-supplier=Analog+Devices, ComponentLink2Description=https://datasheet.octopart.com:443/LT317AT%23PBF-Analog-Devices-datasheet-14357770.pdf?src-supplier=Linear+Technology, ComponentLink2URL=https://datasheet.octopart.com:443/LT317AT%23PBF-Analog-Devices-datasheet-14357770.pdf?src-supplier=Linear+Technology, ComponentLink3Description=https://sigma.octopart.com:443/57689916/technical_drawing/Linear-Technology-LT317AT%23PBF.pdf?src-supplier=Linear+Technology, ComponentLink3URL=https://sigma.octopart.com:443/57689916/technical_drawing/Linear-Technology-LT317AT%23PBF.pdf?src-supplier=Linear+Technology, ComponentLink4Description=https://datasheet.octopart.com:443/LT317AT%23PBF-Linear-Technology-datasheet-7628552.pdf?src-supplier=Nu+Horizons, ComponentLink4URL=https://datasheet.octopart.com:443/LT317AT%23PBF-Linear-Technology-datasheet-7628552.pdf?src-supplier=Nu+Horizons, ComponentLink5Description=https://datasheet.octopart.com:443/LT317AT%23PBF-Linear-Technology-datasheet-526547.pdf?src-supplier=Farnell, ComponentLink5URL=https://datasheet.octopart.com:443/LT317AT%23PBF-Linear-Technology-datasheet-526547.pdf?src-supplier=Farnell, ComponentLink6Description=https://datasheet.octopart.com:443/LT317AT%23PBF-Linear-Technology-datasheet-530213.pdf?src-supplier=Farnell, ComponentLink6URL=https://datasheet.octopart.com:443/LT317AT%23PBF-Linear-Technology-datasheet-530213.pdf?src-supplier=Farnell, ComponentLink7Description=http://sigma.octopart.com:80/conflict_mineral_statement/Analog-Devices-company-33.pdf?src-supplier=Compliance+Statements, ComponentLink7URL=http://sigma.octopart.com:80/conflict_mineral_statement/Analog-Devices-company-33.pdf?src-supplier=Compliance+Statements, ComponentLink8Description=https://octopart.com:443/opatz8j6/c1?t=JX-HlaGeagCKLogq6AWfLzWzIGWXGD7G-aJPOdFQQk1YBPE6TRsS4g_GCD3O9PwGoDK8T74oP8tfOzPo3LZsKQh3Wf5m0non0nDaxxZsATcNxQsOvV_cHkJVj1UJryIwVmjht0TZjItwWmrLTt9mgAN_Jdw0b9-T9qwNWwn3p6ynmb2yvY2RgQnPw8Npwy0UnlpHeB5gXTOA9CBEG8loW_y7i_LyiYydq06s3X1evJpsdhOcp5CC6-ulsNahPFfhP3qXtmoF3UJG_lKiwKNvd1uy_Il9GfXWm35m8Won24wHtfrQpeFk&src-supplier=Compliance+Statements, ComponentLink8URL=https://octopart.com:443/opatz8j6/c1?t=JX-HlaGeagCKLogq6AWfLzWzIGWXGD7G-aJPOdFQQk1YBPE6TRsS4g_GCD3O9PwGoDK8T74oP8tfOzPo3LZsKQh3Wf5m0non0nDaxxZsATcNxQsOvV_cHkJVj1UJryIwVmjht0TZjItwWmrLTt9mgAN_Jdw0b9-T9qwNWwn3p6ynmb2yvY2RgQnPw8Npwy0UnlpHeB5gXTOA9CBEG8loW_y7i_LyiYydq06s3X1evJpsdhOcp5CC6-ulsNahPFfhP3qXtmoF3UJG_lKiwKNvd1uy_Il9GfXWm35m8Won24wHtfrQpeFk&src-supplier=Compliance+Statements, Height=14.886mm, Lead Free="Lead Free", Length=10.69mm, Lifecycle Status=Production, Manufacturer Part Number=LT317AT#PBF, Min Current Limit=1.5A, Mounting Technology="Through Hole", Number of Channels=1, Number of Outputs=1, Number of Regulators=1, Output Current=1.5A, Output Type=Adjustable, Packaging=Bulk, Pins=3, Polarity=Positive, Pricing="1=6.37, 10=4.896, 50=4.3046, 100=4.1214, 250=3.928, 500=3.81142, 1000=3.71547, 2500=3.61417 (USD)", REACH SVHC=No, RoHS=Compliant, Schedule B="8542390000, 8542390000|8542390000|8542390000|8542390000|8542390000|8542390000|8542390000|8542390000|8542390000|8542390000|8542390000|8542390000|8542390000|8542390000|8542390000|8542390000|8542390000|8542390000|8542390000|8542390000|8542390000|8542390000|8542390000|85", Stock=773, Supplier=DigiKey, Tolerance=1%, Width=4.572mm

## Via types
v1: diameter 50, hole 28, L1 to L6, 94 vias
v2: diameter 100, hole 55, L1 to L6, 26 vias
v3: diameter 80, hole 48, L1 to L6, 14 vias

## Nets (pads, with @x,y where several pads share a name; then routed paths per layer and width w, separated by ;. In a path a pad name is that pad's centre, name@x,y a point inside that pad or via, vN(x,y) a via of type N, cw(c..) or ccw(c..) an arc to the next point about the centre after c; other vN are vias at no path point)
+2.5V: C11.2 C57.1 R27.2 R30.1 R31.2 R32.2 R34.2 T1.T U18.3 | length 7669.8
  L1 w10: R30.1@236.22,3757.87 224.41,3757.87 198.39,3731.85 196.13,3731.85 175.63,3711.35 175.63,3654.79 198.1,3632.32 973.16,3632.32 995.63,3654.79 995.63,3739.37 985.91,3749.09 943.82,3749.09 R31.2@935.04,3757.87 946.85,3757.87 988.98,3800 1087.14,3800 1093,3794.14 v1(1093,3757) ; R32.2@809.04,2738.7 v1(891.06,2738.7) ; R34.2@1556.81,1452.83 1564.65,1445 1649.29,1445 v1(1655.24,1439.06) ; C11.2@2605,2007.4 C11.2@2612.87,2007.4 ; v1(2685.47,2080) C11.2@2612.87,2007.4 ; C57.1@2785,1932.6 2772.28,1945.32 2745.42,1945.32 2683.33,2007.4 ; T1.T@3332.97,2426.34 3332.97,2197.97 3291.47,2156.47 ; R27.2@3557.5,1995.13 3452.8,1995.13 3291.47,2156.47 ; C11.2@2612.87,2007.4 2683.33,2007.4 ; 2683.33,2007.4 2692.2,2007.4 2873.41,2188.61 3030.28,2188.61 3049.98,2208.32 3049.98,2216.39 3069.69,2236.09 U18.3@3104.38,2236.09 3211.84,2236.09 3291.47,2156.47
  L3 w10: v1@898.72,2731.05 v1(891.06,2738.7) ; v1(1093,3757) 891.06,3555.06 v1(891.06,2738.7) ; v1(1655.24,1439.06) 1656.81,1477.2 1656.81,1481.31 874.42,2331 874.42,2334.9 874.42,2335.1 874.43,2335.31 v1(891.06,2738.7)
  L4 w10: v1(1655.24,1439.06) 1859.29,1439.06 2083.34,1215 2276.57,1215 2685.47,1623.9 v1(2685.47,2080)
+5V: C7.2 C8.2 C9.2 C10.1 C13.1 C14.2 C15.2 C16.2 C17.2 C18.1 C19.1 C20.1 C21.1 C22.1 C23.1 C24.2 C25.1 C26.1 C27.1 C31.2 C38.1 C44.2 C46.2 C47.2 C48.2 C50.2 R26.2 T2.T U1.14 U2.1 U3.1 U4.5 U5.5 U6.1 U7.1 U8.1 U9.5 U10.5 U11.1 U12.14 U13.5 U14.5 U15.5 U16.5 U17.3 U18.1 | length 31810.4
  L1 w10: C13.1@192.91,702.76 205.63,715.47 205.63,745.78 345.99,886.14 368.36,886.14 384.17,870.33 384.17,799.63 377.81,793.27 377.81,722.58 394.68,705.71 526.3,705.71 725.17,904.58 1621.21,904.58 1751.96,773.84 1751.96,763.35 1780.75,734.56 1780.75,670.95 1771.96,662.17 ; C19.1@403.54,4053.15 C19.1@411.42,4053.15 ; v1(470,3125) 470,3114.18 457.57,3101.75 457.57,3100.86 451.72,3095 425,3095 354.42,3024.42 354.42,3004.16 C21.1@347.82,2997.56 438.49,2997.56 459.4,3018.46 614.66,3018.46 640.49,2992.64 U9.5@679.31,2992.64 769.6,2992.64 794.64,2967.6 908.04,2967.6 932.1,2991.65 C20.1@1037.13,2991.65 1069.84,2991.65 1078.92,3000.73 1078.92,3023.17 1088,3032.24 1252.85,3032.24 1292.46,2992.64 1340.14,2992.64 1368.23,3020.72 1496.88,3020.72 1505.67,3011.94 1505.67,2648.3 1489.49,2632.12 C22.1@1489.49,2486.77 ; v1(510,4048) 416.57,4048 C19.1@411.42,4053.15 ; C18.1@657.48,4350.39 644.76,4337.68 644.76,4319.68 545.56,4220.47 U4.5@478.35,4220.47 478.35,4194.74 462.33,4178.73 459.68,4178.73 442.48,4161.53 442.48,4084.21 C19.1@411.42,4053.15 ; U13.5@675.38,2481.85 678.44,2481.85 684.26,2487.68 U13.5@684.26,2490.74 ; v1(814.29,2215.08) 814.29,2348.14 750.06,2412.37 750.06,2440.66 717.84,2472.87 693.21,2472.87 688.69,2477.39 688.69,2486.31 U13.5@684.26,2490.74 ; C23.1@819.8,2480.87 819.8,2472.99 911.57,2381.22 984.47,2381.22 1015.82,2349.87 1065.52,2349.87 1069.43,2353.78 1163.78,2353.78 1165,2355 1338.84,2355 1373.84,2390.01 1373.84,2418.29 1400.24,2444.69 1484.91,2444.69 ; U5.5@891.73,4220.47 972.44,4220.47 v1@974.41,4222.44 ; v1(1035.16,1478.43) 968.98,1412.24 888.74,1412.24 856.02,1444.96 C27.1@856.02,1452.83 762.26,1452.83 721.67,1412.24 591.94,1412.24 580.36,1423.82 580.36,1441.26 568.78,1452.83 C26.1@541.06,1452.83 553.78,1440.12 553.78,1382.99 639.49,1297.28 U15.5@639.49,1242.2 681.4,1242.2 721,1281.81 807.73,1281.81 833.76,1255.78 833.76,1209.42 921.61,1121.58 1194.6,1121.58 1282.44,1209.42 1282.44,1273.02 1273.65,1281.81 1219.91,1281.81 1180.31,1242.2 U16.5@1097.54,1242.2 ; U14.5@1339.16,2481.85 1339.16,2504.16 1365,2530 1420,2530 1454.76,2495.24 1471.86,2495.24 1484.91,2482.2 1484.91,2444.69 ; U12.14@1526.57,664.68 1668.09,664.68 1673.23,669.82 ; C25.1@1673.23,702.76 1673.23,669.82 ; v1(1781.26,601.64) 1773.6,609.29 1773.6,625.85 1771.96,627.49 1771.96,662.17 ; v1(2242.91,3107.01) 2287.01,3107.01 2340.82,3160.82 2340.82,3174.96 2342.1,3176.24 2345.24,3176.24 C38.1@2345.24,3187.68 ; C9.2@2245,2007.4 C10.1@2425,2007.4 2472.78,2007.4 2496.71,2031.33 2564.41,2031.33 ; C38.1@2341.68,3176.24 2419.05,3253.62 U6.1@2481.1,3253.62 ; U7.1@2496.26,1131.3 2496.26,1159.84 2268.09,1388.02 2231.54,1388.02 C17.2@2218.83,1400.73 C16.2@2441.27,1400.73 C47.2@2660,1400.73 2970.33,1400.73 3220.87,1150.2 U17.3@3233.66,1150.2 ; T2.T@2640,2440 2769.17,2310.83 2769.17,2236.09 ; v1(2794.09,4061.73) 2773.43,4041.06 U1.14@2773.43,3897.68 2914.84,3897.68 2937.8,3874.72 C24.2@2945.67,3874.72 ; U18.1@2904.38,2236.09 2769.17,2236.09 ; v1(3300,2015) 3319.87,1995.13 R26.2@3383.75,1995.13 3383.75,1997.69 3272.32,2109.12 3057.98,2109.12 3046.15,2120.94 2834.02,2120.94 2744.41,2031.33 2744.41,1983.47 2757.88,1970 2812.12,1970 2825.59,1956.53 2825.59,1908.67 2816.8,1899.88 2753.2,1899.88 2720.48,1932.6 2720.48,1941.97 2687.76,1974.68 2573.2,1974.68 2564.41,1983.47 2564.41,2031.33 ; v1(3310,1185) 3289.88,1164.88 3248.35,1164.88 U17.3@3233.66,1150.2 ; U8.1@3867.52,958.46 3870.82,955.16 3914.84,955.16 3960,910 3969.14,910 3969.77,909.37 3994.37,909.37 3995,910 v1(3995,901.72) 4055.72,901.72 4165.51,1011.5 4165.51,1073.14 4153.26,1085.39 4083.28,1085.39 4052.2,1116.47 4052.2,1154.37 4010,1196.57 4010,1430 ; v1(4055,1430) 4010,1430 ; U2.1@4830,1252.83 4830,1281.38 4835.43,1286.81 5125.47,1286.81 5215.46,1376.8 5215.46,1424.66 5206.39,1433.74 4817.15,1433.74 4808.07,1442.82 C14.2@4808.07,1475.54 C8.2@4991.47,1475.54 5182.75,1475.54 5208.28,1450 5270,1450 5280,1460 5286.37,1460 5286.49,1460.11 5304.58,1460.11 v1(5312.23,1467.77) ; C15.2@5838.24,1540.54 C15.2@5846.11,1540.54 ; v1(5980,1700) 5974.5,1694.5 5974.5,1668.93 C15.2@5846.11,1540.54 ; U3.1@6075,1287.83 6075,1316.38 6080.43,1321.81 6149.56,1321.81 6269.55,1441.8 6269.55,1507.82 6236.83,1540.54 C44.2@6228.96,1540.54 C7.2@6033.6,1540.54 C15.2@5846.11,1540.54 ; U13.5@684.26,2490.74 688.69,2490.74 717.13,2490.74 912.86,2295 1420,2295 1475,2240 1527.56,2240 1562.32,2205.24 1615.52,2205.24 1621.38,2211.09 1621.38,2296.74 1530.08,2388.04 1530.08,2435.9 1521.29,2444.69 1484.91,2444.69 ; 1673.23,669.82 1673.95,670.55 1715.72,670.55 1724.1,662.17 1771.96,662.17 ; 2564.41,2031.33 2769.17,2236.09 ; U17.3@3233.66,1150.2 3233.66,1482.69 3265.46,1514.49 3454.13,1514.49 3488.08,1480.54 C48.2@3495.96,1480.54 C31.2@3695.43,1480.54 C50.2@3894.91,1480.54 3959.46,1480.54 4010,1430
  L3 w10: v1(510,4048) 799.97,4048 v1(973.43,4221.46) 2634.37,4221.46 v1(2794.09,4061.73) ; v1(1781.26,601.64) 1035.16,1347.74 v1(1035.16,1478.43) 814.29,1699.29 v1(814.29,2215.08) 1630.32,1399.06 1671.8,1399.06 1695.24,1422.49 1695.24,1775.06 1532.17,1938.13 1532.17,2396.47 2107.85,2972.15 ; v1@2242.71,3107.01 2107.85,2972.15 ; T2.T@2640,2440 2107.85,2972.15 ; v1(3300,2015) 3305,2010 3305,1190 v1(3310,1185) ; v1(5312.23,1467.77) 5747.77,1467.77 v1(5980,1700)
  L4 w10: v1(470,3125) 470,4008 v1(510,4048) ; v1(4055,1430) 4055,1475 4205,1625 4414.6,1625 4438.04,1648.43 4438.04,1681.57 4414.46,1705.15 4414.46,1817.74 4535,1938.28 4535,1966.57 4558.43,1990 4790,1990 v1(5312.23,1467.77)
+20V: C12.1 C34.2 C36.2 C51.2 C52.2 C53.2 C55.2 C56.2 C58.2 P2.1 U7.8 U8.8 U17.1
  other v3: 2865,315 3235,350 2860,415 2960,445 3085,445 3210,445
+20V_1: C3.2 C28.2 C30.2 C32.2 P7.1 U2.8
  other v3: 4585,245 4585,370 4710,405 4840,405
+20V_2: C6.2 C29.2 C33.2 C35.2 P8.1 U3.8
  other v3: 5900,230 5900,340 6095,405 5990,410
+170: M1.Drain M2.Drain P1.1
  other v2: 5095,3555 5440,3555 5095,3662.5 5440,3662.5 5095,3770 5440,3770 5095,3877.5 5440,3877.5 5095,3985 5440,3985
-20V_1: C3.1 C28.1 C30.1 C32.1 P9.1 U2.6 | length 1531
  L1 w10: v1@4666.38,965 4730,1028.62 U2.6@4730,1057.17 ; C32.1@4922.4,880 C3.1@4922.4,766.67 C30.1@4922.4,653.33 C28.1@4922.4,540 4932.4,530 v1(5010,530) 5013.28,526.72 5043.28,526.72 5185,385 P9.1@5185,220
  L4 w10: v1(4658.19,965) 5010,613.19 v1(5010,530)
-20V_2: C6.1 C29.1 C33.1 C35.1 P10.1 U3.6 | length 2562.3
  L1 w10: P10.1@5530,230 5715,45 6305,45 6395,135 6395,365.85 6255.85,505 6219.53,505 6167.4,557.13 C6.1@6167.4,565 C29.1@6167.4,688.33 C33.1@6167.4,811.67 6165,814.07 6165,935 C35.1@6167.4,935 6167.4,942.87 6180.12,955.59 6187.99,955.59 6242.4,1010 v1(6295,1010) ; v1(5945,970) 5975,1000 U3.6@5975,1092.17
  L4 w10: v1(5945,970) 6255,970 v1(6295,1010)